# EAGLE board IOB-I2C-PCA9685-PWM_array (EAGLE 7.7.0)
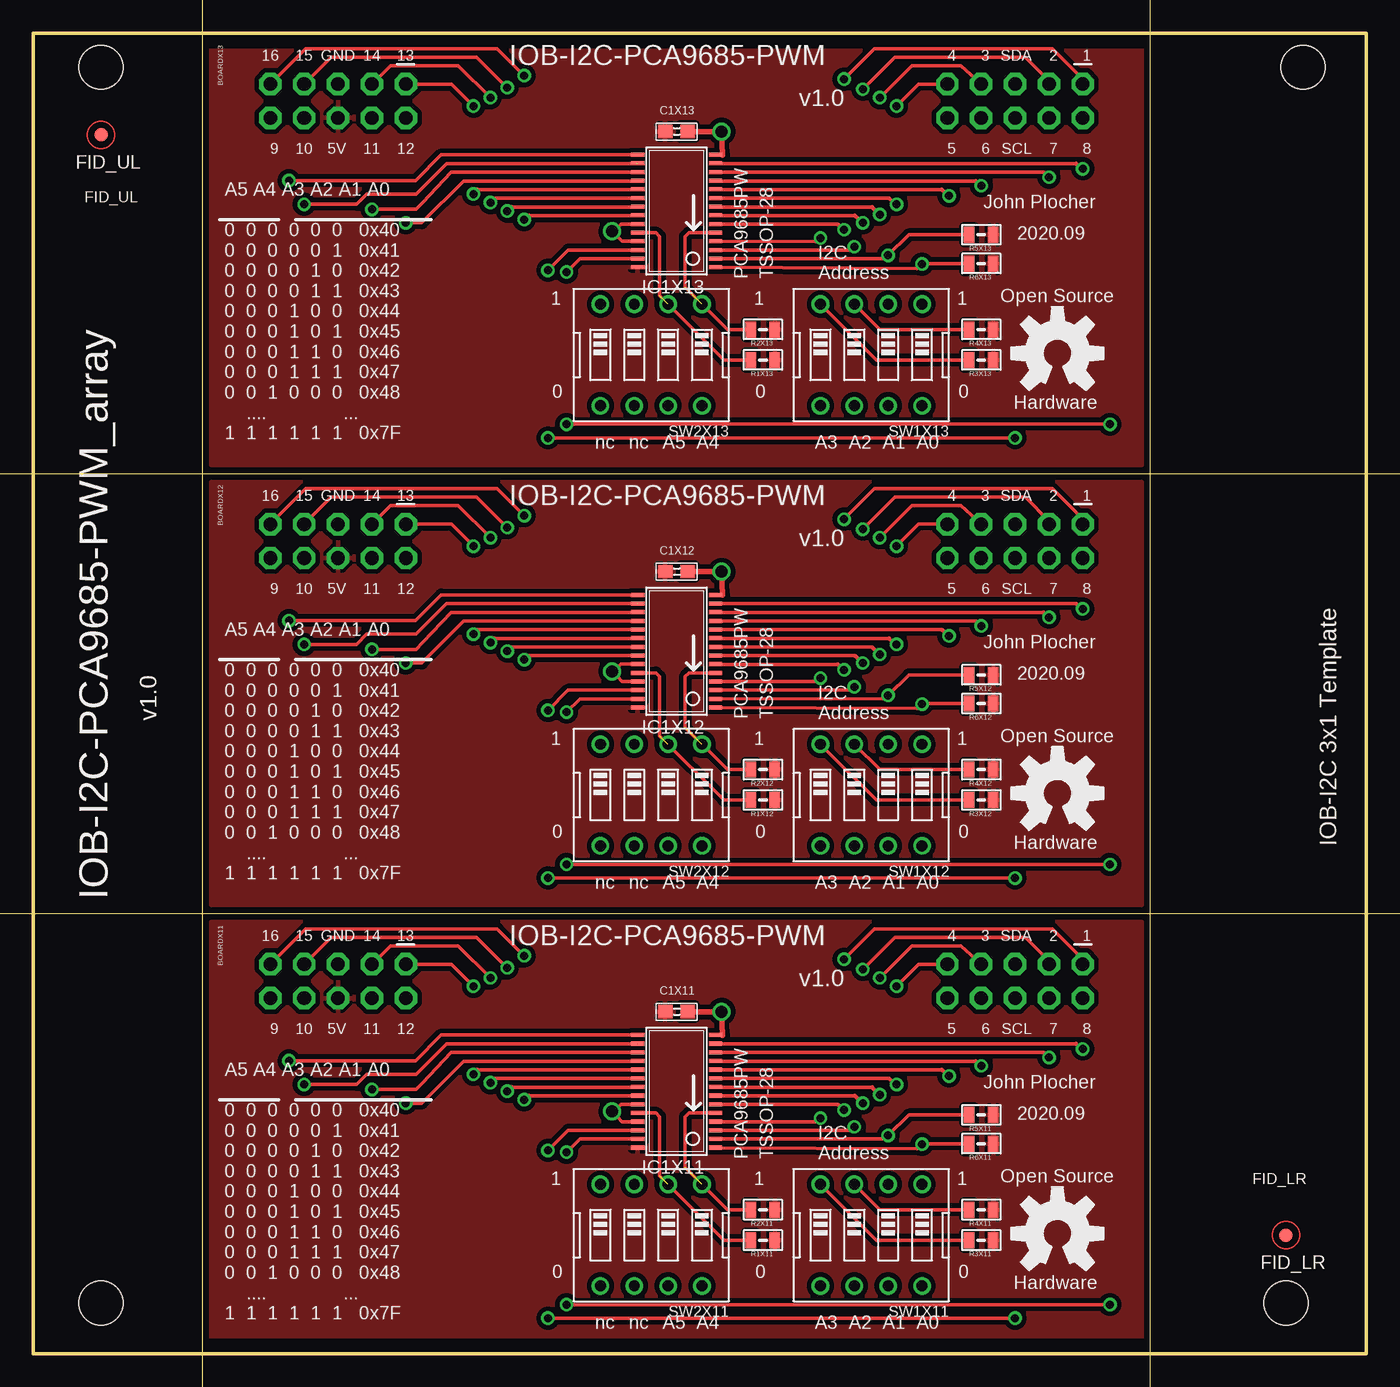
[diagram p0: board, top side]
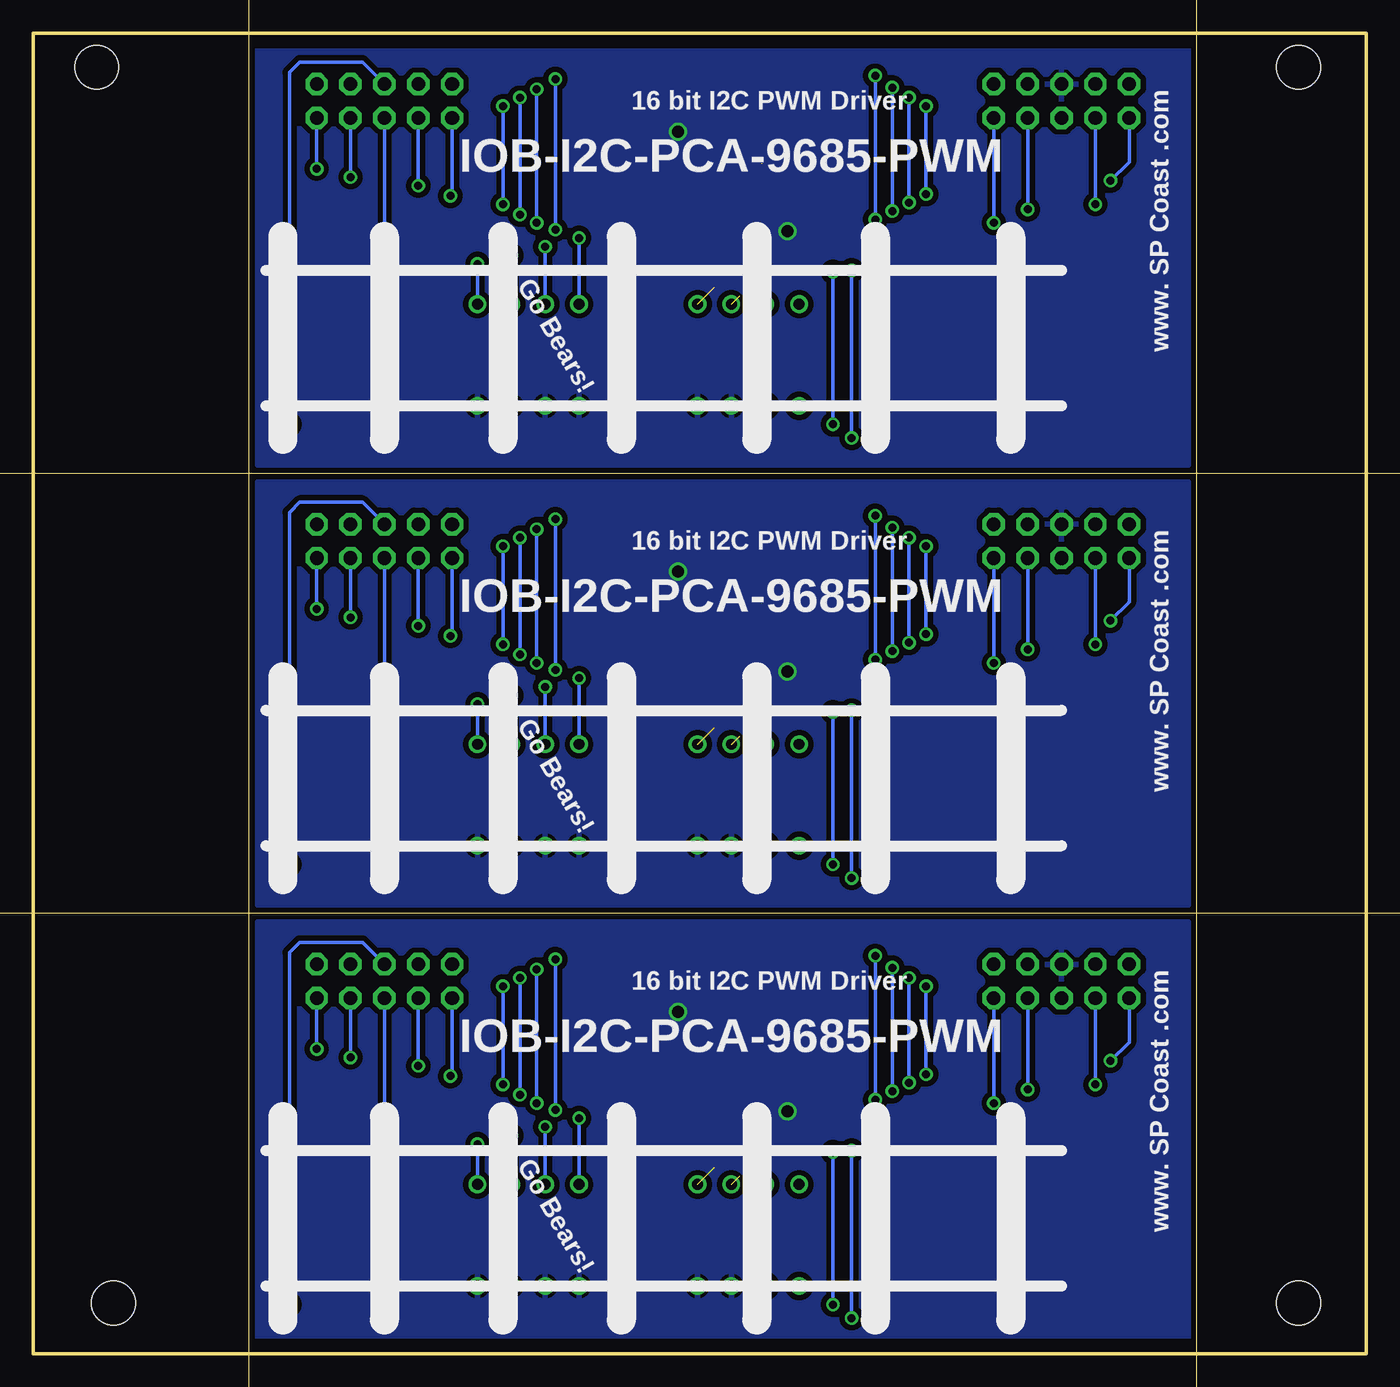
[diagram p1: board, bottom side, seen from below]

Size 100 x 99.06 mm. Coordinates in mm from the lower left corner, seen from the top.
Copper layers (1*16): Top 0.035mm / dielectric 1.5mm / Bottom 0.035mm
Design rules "default": minimum track width 10mil, minimum drill 0.6mm, track to track 8mil, track to pad 8mil, pad to pad 8mil, via to via 8mil, smd to smd 8mil, copper to edge 40mil, drill to drill 8mil, minimum pad ring 10mil, minimum via ring 8mil, stop-mask expansion 4mil, vias tented up to drill 0mil, thermal gap 10mil

## Footprints (pad centres in the part's own frame; a part is rotated, then mirrored left to right if it is on the bottom)
I2C-EXPANDER = drill 1.016 pad 1.676 octagon: 1 30.48,1.27; 2 27.94,1.27; 3 22.86,1.27; 4 20.32,1.27; 5 20.32,-1.27; 6 22.86,-1.27; 7 27.94,-1.27; 8 30.48,-1.27; 9 -30.48,-1.27; 10 -27.94,-1.27; 11 -22.86,-1.27; 12 -20.32,-1.27; 13 -20.32,1.27; 14 -22.86,1.27; 15 -27.94,1.27; 16 -30.48,1.27; GND -25.4,1.27; SCL 25.4,-1.27; SDA 25.4,1.27; VCC -25.4,-1.27
0603-CAP = smd 1.1 x 1: 1 -0.85,0; 2 0.85,0
FIDUCIAL_1MM = smd 1 x 1: 1 0,0
TSSOP28 = smd 0.305 x 0.991: 1 -4.225,-2.918; 2 -3.575,-2.918; 3 -2.925,-2.918; 4 -2.275,-2.918; 5 -1.625,-2.918; 6 -0.975,-2.918; 7 -0.325,-2.918; 8 0.325,-2.918; 9 0.975,-2.918; 10 1.625,-2.918; 11 2.275,-2.918; 12 2.925,-2.918; 13 3.575,-2.918; 14 4.225,-2.918; 15 4.225,2.918; 16 3.575,2.918; 17 2.925,2.918; 18 2.275,2.918; 19 1.625,2.918; 20 0.975,2.918; 21 0.325,2.918; 22 -0.325,2.918; 23 -0.975,2.918; 24 -1.625,2.918; 25 -2.275,2.918; 26 -2.925,2.918; 27 -3.575,2.918; 28 -4.225,2.918
0805-RES = smd 0.8 x 1.2: 1 -0.9,0; 2 0.9,0
EDG-04 = drill 0.813: 1 -3.81,-3.81; 2 -1.27,-3.81; 3 1.27,-3.81; 4 3.81,-3.81; 5 3.81,3.81; 6 1.27,3.81; 7 -1.27,3.81; 8 -3.81,3.81
BOARD-TEMPLATE-IOB-I2C-3X1-ARRAY = hole 3.3: 5.08,96.52; 95.25,96.52; 93.98,3.81; 5.08,3.81

## Placement (x,y rotation side)
BOARDX11  CONNECTOR-I2C-EXPANDER  [I2C-EXPANDER]  48.26,27.94 0 top
BOARDX12  CONNECTOR-I2C-EXPANDER  [I2C-EXPANDER]  48.26,60.96 0 top
BOARDX13  CONNECTOR-I2C-EXPANDER  [I2C-EXPANDER]  48.26,93.98 0 top
C1X11  0.1uF  [0603-CAP]  48.26,25.65 0 top
C1X12  0.1uF  [0603-CAP]  48.26,58.67 0 top
C1X13  0.1uF  [0603-CAP]  48.26,91.69 0 top
FID_LR  FIDUCIAL  [FIDUCIAL_1MM]  93.98,8.89 0 top
FID_UL  FIDUCIAL  [FIDUCIAL_1MM]  5.08,91.44 0 top
IC1X11  PCA9685PW  [TSSOP28]  48.26,19.68 90 top
IC1X12  PCA9685PW  [TSSOP28]  48.26,52.7 90 top
IC1X13  PCA9685PW  [TSSOP28]  48.26,85.72 90 top
R1X11  10k  [0805-RES]  54.74,8.51 180 top
R1X12  10k  [0805-RES]  54.74,41.53 180 top
R1X13  10k  [0805-RES]  54.74,74.55 180 top
R2X11  10k  [0805-RES]  54.74,10.79 180 top
R2X12  10k  [0805-RES]  54.74,43.81 180 top
R2X13  10k  [0805-RES]  54.74,76.83 180 top
R3X11  10k  [0805-RES]  71.12,8.51 180 top
R3X12  10k  [0805-RES]  71.12,41.53 180 top
R3X13  10k  [0805-RES]  71.12,74.55 180 top
R4X11  10k  [0805-RES]  71.12,10.79 180 top
R4X12  10k  [0805-RES]  71.12,43.81 180 top
R4X13  10k  [0805-RES]  71.12,76.83 180 top
R5X11  10k  [0805-RES]  71.12,17.91 180 top
R5X12  10k  [0805-RES]  71.12,50.93 180 top
R5X13  10k  [0805-RES]  71.12,83.95 180 top
R6X11  10k  [0805-RES]  71.12,15.75 180 top
R6X12  10k  [0805-RES]  71.12,48.77 180 top
R6X13  10k  [0805-RES]  71.12,81.79 180 top
SW1X11  SPSTx4  [EDG-04]  62.87,8.89 180 top
SW1X12  SPSTx4  [EDG-04]  62.87,41.91 180 top
SW1X13  SPSTx4  [EDG-04]  62.87,74.93 180 top
SW2X11  SPSTx4  [EDG-04]  46.35,8.89 180 top
SW2X12  SPSTx4  [EDG-04]  46.35,41.91 180 top
SW2X13  SPSTx4  [EDG-04]  46.35,74.93 180 top
U$1X11  OSHW  [OSHW-LOGO-L]  76.83,9.02 0 top
U$1X12  OSHW  [OSHW-LOGO-L]  76.83,42.04 0 top
U$1X13  OSHW  [OSHW-LOGO-L]  76.83,75.06 0 top
U$5X1  BOARD  [BOARD-TEMPLATE-IOB-I2C-3X1-ARRAY]  0,0 0 top

## Library data of the parts
BOARDX11-BOARDX13 C1X11-C1X13 FID_LR FID_UL IC1X11-IC1X13 R1X11-R1X13 R2X11-R2X13 R3X11-R3X13 R4X11-R4X13 R5X11-R5X13 R6X11-R6X13 SW1X11-SW1X13 SW2X11-SW2X13 U$1X11-U$1X13 U$5X1 = SPCoast

## Nets
A0X11: IC1X11.1 R6X11.2 SW1X11.1
A0X12: IC1X12.1 R6X12.2 SW1X12.1
A0X13: IC1X13.1 R6X13.2 SW1X13.1
A1X11: IC1X11.2 R5X11.2 SW1X11.2
A1X12: IC1X12.2 R5X12.2 SW1X12.2
A1X13: IC1X13.2 R5X13.2 SW1X13.2
A2X11: IC1X11.3 R4X11.2 SW1X11.3
A2X12: IC1X12.3 R4X12.2 SW1X12.3
A2X13: IC1X13.3 R4X13.2 SW1X13.3
A3X11: IC1X11.4 R3X11.2 SW1X11.4
A3X12: IC1X12.4 R3X12.2 SW1X12.4
A3X13: IC1X13.4 R3X13.2 SW1X13.4
A4X11: IC1X11.5 R2X11.2 SW2X11.1
A4X12: IC1X12.5 R2X12.2 SW2X12.1
A4X13: IC1X13.5 R2X13.2 SW2X13.1
A5X11: IC1X11.24 R1X11.2 SW2X11.2
A5X12: IC1X12.24 R1X12.2 SW2X12.2
A5X13: IC1X13.24 R1X13.2 SW2X13.2
GNDX11: BOARDX11.GND C1X11.2 IC1X11.14 IC1X11.23 IC1X11.25 SW1X11.5 SW1X11.6 SW1X11.7 SW1X11.8 SW2X11.7 SW2X11.8
GNDX12: BOARDX12.GND C1X12.2 IC1X12.14 IC1X12.23 IC1X12.25 SW1X12.5 SW1X12.6 SW1X12.7 SW1X12.8 SW2X12.7 SW2X12.8
GNDX13: BOARDX13.GND C1X13.2 IC1X13.14 IC1X13.23 IC1X13.25 SW1X13.5 SW1X13.6 SW1X13.7 SW1X13.8 SW2X13.7 SW2X13.8
P1X11: BOARDX11.1 IC1X11.6
P1X12: BOARDX12.1 IC1X12.6
P1X13: BOARDX13.1 IC1X13.6
P2X11: BOARDX11.2 IC1X11.7
P2X12: BOARDX12.2 IC1X12.7
P2X13: BOARDX13.2 IC1X13.7
P3X11: BOARDX11.3 IC1X11.8
P3X12: BOARDX12.3 IC1X12.8
P3X13: BOARDX13.3 IC1X13.8
P4X11: BOARDX11.4 IC1X11.9
P4X12: BOARDX12.4 IC1X12.9
P4X13: BOARDX13.4 IC1X13.9
P5X11: BOARDX11.5 IC1X11.10
P5X12: BOARDX12.5 IC1X12.10
P5X13: BOARDX13.5 IC1X13.10
P6X11: BOARDX11.6 IC1X11.11
P6X12: BOARDX12.6 IC1X12.11
P6X13: BOARDX13.6 IC1X13.11
P7X11: BOARDX11.7 IC1X11.12
P7X12: BOARDX12.7 IC1X12.12
P7X13: BOARDX13.7 IC1X13.12
P8X11: BOARDX11.8 IC1X11.13
P8X12: BOARDX12.8 IC1X12.13
P8X13: BOARDX13.8 IC1X13.13
P9X11: BOARDX11.9 IC1X11.15
P9X12: BOARDX12.9 IC1X12.15
P9X13: BOARDX13.9 IC1X13.15
P10X11: BOARDX11.10 IC1X11.16
P10X12: BOARDX12.10 IC1X12.16
P10X13: BOARDX13.10 IC1X13.16
P11X11: BOARDX11.11 IC1X11.17
P11X12: BOARDX12.11 IC1X12.17
P11X13: BOARDX13.11 IC1X13.17
P12X11: BOARDX11.12 IC1X11.18
P12X12: BOARDX12.12 IC1X12.18
P12X13: BOARDX13.12 IC1X13.18
P13X11: BOARDX11.13 IC1X11.19
P13X12: BOARDX12.13 IC1X12.19
P13X13: BOARDX13.13 IC1X13.19
P14X11: BOARDX11.14 IC1X11.20
P14X12: BOARDX12.14 IC1X12.20
P14X13: BOARDX13.14 IC1X13.20
P15X11: BOARDX11.15 IC1X11.21
P15X12: BOARDX12.15 IC1X12.21
P15X13: BOARDX13.15 IC1X13.21
P16X11: BOARDX11.16 IC1X11.22
P16X12: BOARDX12.16 IC1X12.22
P16X13: BOARDX13.16 IC1X13.22
SCLX11: BOARDX11.SCL IC1X11.26
SCLX12: BOARDX12.SCL IC1X12.26
SCLX13: BOARDX13.SCL IC1X13.26
SDAX11: BOARDX11.SDA IC1X11.27
SDAX12: BOARDX12.SDA IC1X12.27
SDAX13: BOARDX13.SDA IC1X13.27
VCCX11: BOARDX11.VCC C1X11.1 IC1X11.28 R1X11.1 R2X11.1 R3X11.1 R4X11.1 R5X11.1 R6X11.1
VCCX12: BOARDX12.VCC C1X12.1 IC1X12.28 R1X12.1 R2X12.1 R3X12.1 R4X12.1 R5X12.1 R6X12.1
VCCX13: BOARDX13.VCC C1X13.1 IC1X13.28 R1X13.1 R2X13.1 R3X13.1 R4X13.1 R5X13.1 R6X13.1

## Tracks (layer width: path | path; a pad name or v marks a point on that pad's centre or on a via)
A0X11  (via drill 0.6 pad 0.9)
  Top 0.254: IC1X11.1 66.29,15.37 66.64,15.71 v66.67,15.71 66.71,15.75 R6X11.2
  Bottom 0.254: v66.67,15.71 SW1X11.1
A0X12  (via drill 0.6 pad 0.9)
  Top 0.254: IC1X12.1 66.29,48.39 66.64,48.73 v66.67,48.73 66.71,48.77 R6X12.2
  Bottom 0.254: v66.67,48.73 SW1X12.1
A0X13  (via drill 0.6 pad 0.9)
  Top 0.254: IC1X13.1 66.29,81.41 66.64,81.75 v66.67,81.75 66.71,81.79 R6X13.2
  Bottom 0.254: v66.67,81.75 SW1X13.1
A1X11  (via drill 0.6 pad 0.9)
  Top 0.254: IC1X11.2 63.75,16.13 63.99,16.36 v64.14,16.36 65.68,17.91 R5X11.2
  Bottom 0.254: v64.14,16.36 SW1X11.2
A1X12  (via drill 0.6 pad 0.9)
  Top 0.254: IC1X12.2 63.75,49.15 63.99,49.38 v64.14,49.38 65.68,50.93 R5X12.2
  Bottom 0.254: v64.14,49.38 SW1X12.2
A1X13  (via drill 0.6 pad 0.9)
  Top 0.254: IC1X13.2 63.75,82.17 63.99,82.4 v64.14,82.4 65.68,83.95 R5X13.2
  Bottom 0.254: v64.14,82.4 SW1X13.2
A2X11  (via drill 0.6 pad 0.9)
  Top 0.254: IC1X11.3 61.21,16.76 61.46,17.01 v61.59,17.01 | R4X11.2 63.5,10.79 SW1X11.3
  Bottom 0.254: v61.59,17.01 SW1X11.3
A2X12  (via drill 0.6 pad 0.9)
  Top 0.254: IC1X12.3 61.21,49.78 61.46,50.03 v61.59,50.03 | R4X12.2 63.5,43.81 SW1X12.3
  Bottom 0.254: v61.59,50.03 SW1X12.3
A2X13  (via drill 0.6 pad 0.9)
  Top 0.254: IC1X13.3 61.21,82.8 61.46,83.05 v61.59,83.05 | R4X13.2 63.5,76.83 SW1X13.3
  Bottom 0.254: v61.59,83.05 SW1X13.3
A3X11  (via drill 0.6 pad 0.9)
  Top 0.254: IC1X11.4 58.67,17.4 58.94,17.66 v59.05,17.66 | R3X11.2 63.25,8.51 SW1X11.4
  Bottom 0.254: v59.05,17.66 SW1X11.4
A3X12  (via drill 0.6 pad 0.9)
  Top 0.254: IC1X12.4 58.67,50.42 58.94,50.68 v59.05,50.68 | R3X12.2 63.25,41.53 SW1X12.4
  Bottom 0.254: v59.05,50.68 SW1X12.4
A3X13  (via drill 0.6 pad 0.9)
  Top 0.254: IC1X13.4 58.67,83.44 58.94,83.7 v59.05,83.7 | R3X13.2 63.25,74.55 SW1X13.4
  Bottom 0.254: v59.05,83.7 SW1X13.4
A4X11  (1 unrouted)
  Top 0.254: IC1X11.5 49.17,18.06 48.9,17.78 48.9,13.97 52.07,10.79 R2X11.2
A4X12  (1 unrouted)
  Top 0.254: IC1X12.5 49.17,51.08 48.9,50.8 48.9,46.99 52.07,43.81 R2X12.2
A4X13  (1 unrouted)
  Top 0.254: IC1X13.5 49.17,84.1 48.9,83.82 48.9,80.01 52.07,76.83 R2X13.2
A5X11  (1 unrouted)
  Top 0.254: IC1X11.24 46.71,18.06 46.99,17.78 46.99,13.34 51.82,8.51 R1X11.2
A5X12  (1 unrouted)
  Top 0.254: IC1X12.24 46.71,51.08 46.99,50.8 46.99,46.35 51.82,41.53 R1X12.2
A5X13  (1 unrouted)
  Top 0.254: IC1X13.24 46.71,84.1 46.99,83.82 46.99,79.38 51.82,74.55 R1X13.2
GNDX11  (via drill 0.9 pad 1.35)
  Top 0.254: IC1X11.25 44.19,17.41 43.81,17.78 | 43.81,17.78 43.81,18.41 44.11,18.71 IC1X11.23 | v43.43,18.16 43.81,17.78 | IC1X11.14 51.69,23.91 51.71,23.89
  Top 0.406: 51.71,23.89 v51.64,25.65 C1X11.2
  pour Bottom (isolate 0.406, rank 2): 83.19,0.64 83.19,32.38 13.34,32.38 13.34,0.64
GNDX12  (via drill 0.9 pad 1.35)
  Top 0.254: IC1X12.25 44.19,50.43 43.81,50.8 | 43.81,50.8 43.81,51.44 44.11,51.73 IC1X12.23 | v43.43,51.18 43.81,50.8 | IC1X12.14 51.69,56.93 51.71,56.91
  Top 0.406: 51.71,56.91 v51.64,58.67 C1X12.2
  pour Bottom (isolate 0.406, rank 2): 83.19,33.66 83.19,65.41 13.34,65.41 13.34,33.66
GNDX13  (via drill 0.9 pad 1.35)
  Top 0.254: IC1X13.25 44.19,83.45 43.81,83.82 | 43.81,83.82 43.81,84.45 44.11,84.75 IC1X13.23 | v43.43,84.2 43.81,83.82 | IC1X13.14 51.69,89.95 51.71,89.94
  Top 0.406: 51.71,89.94 v51.64,91.69 C1X13.2
  pour Bottom (isolate 0.406, rank 2): 83.19,66.67 83.19,98.42 13.34,98.42 13.34,66.67
P1X11  (via drill 0.6 pad 0.9)
  Top 0.254: v60.83,29.59 63.12,31.88 76.45,31.88 78.74,29.59 BOARDX11.1 | 60.35,18.7 51.19,18.7 IC1X11.6
  Top 0.305: 60.35,18.7 v60.83,18.29
  Bottom 0.254: v60.83,18.29 v60.83,29.59
P1X12  (via drill 0.6 pad 0.9)
  Top 0.254: v60.83,62.61 63.12,64.9 76.45,64.9 78.74,62.61 BOARDX12.1 | 60.35,51.72 51.19,51.72 IC1X12.6
  Top 0.305: 60.35,51.72 v60.83,51.31
  Bottom 0.254: v60.83,51.31 v60.83,62.61
P1X13  (via drill 0.6 pad 0.9)
  Top 0.254: v60.83,95.63 63.12,97.92 76.45,97.92 78.74,95.63 BOARDX13.1 | 60.35,84.73 51.19,84.73 IC1X13.6
  Top 0.305: 60.35,84.73 v60.83,84.33
  Bottom 0.254: v60.83,84.33 v60.83,95.63
P2X11  (via drill 0.6 pad 0.9)
  Top 0.254: v62.23,28.83 64.64,31.24 74.42,31.24 76.2,29.46 BOARDX11.2 | 61.64,19.34 51.19,19.34 IC1X11.7
  Top 0.305: 61.64,19.34 v62.23,18.8
  Bottom 0.254: v62.23,18.8 v62.23,28.83
P2X12  (via drill 0.6 pad 0.9)
  Top 0.254: v62.23,61.85 64.64,64.26 74.42,64.26 76.2,62.48 BOARDX12.2 | 61.64,52.37 51.19,52.37 IC1X12.7
  Top 0.305: 61.64,52.37 v62.23,51.82
  Bottom 0.254: v62.23,51.82 v62.23,61.85
P2X13  (via drill 0.6 pad 0.9)
  Top 0.254: v62.23,94.87 64.64,97.28 74.42,97.28 76.2,95.5 BOARDX13.2 | 61.64,85.39 51.19,85.39 IC1X13.7
  Top 0.305: 61.64,85.39 v62.23,84.84
  Bottom 0.254: v62.23,84.84 v62.23,94.87
P3X11  (via drill 0.6 pad 0.9)
  Top 0.254: v63.5,28.19 65.91,30.61 69.6,30.61 BOARDX11.3 | 62.92,20 51.19,20 IC1X11.8
  Top 0.305: 62.92,20 v63.5,19.43
  Bottom 0.254: v63.5,19.43 v63.5,28.19
P3X12  (via drill 0.6 pad 0.9)
  Top 0.254: v63.5,61.21 65.91,63.63 69.6,63.63 BOARDX12.3 | 62.92,53.02 51.19,53.02 IC1X12.8
  Top 0.305: 62.92,53.02 v63.5,52.45
  Bottom 0.254: v63.5,52.45 v63.5,61.21
P3X13  (via drill 0.6 pad 0.9)
  Top 0.254: v63.5,94.23 65.91,96.65 69.6,96.65 BOARDX13.3 | 62.92,86.03 51.19,86.03 IC1X13.8
  Top 0.305: 62.92,86.03 v63.5,85.47
  Bottom 0.254: v63.5,85.47 v63.5,94.23
P4X11  (via drill 0.6 pad 0.9)
  Top 0.254: BOARDX11.4 66.42,29.21 v64.77,27.56 | 64.21,20.64 51.19,20.64 IC1X11.9
  Top 0.305: 64.21,20.64 v64.77,20.19
  Bottom 0.254: v64.77,27.56 v64.77,20.19
P4X12  (via drill 0.6 pad 0.9)
  Top 0.254: BOARDX12.4 66.42,62.23 v64.77,60.58 | 64.21,53.66 51.19,53.66 IC1X12.9
  Top 0.305: 64.21,53.66 v64.77,53.21
  Bottom 0.254: v64.77,60.58 v64.77,53.21
P4X13  (via drill 0.6 pad 0.9)
  Top 0.254: BOARDX13.4 66.42,95.25 v64.77,93.6 | 64.21,86.69 51.19,86.69 IC1X13.9
  Top 0.305: 64.21,86.69 v64.77,86.23
  Bottom 0.254: v64.77,93.6 v64.77,86.23
P5X11  (via drill 0.6 pad 0.9)
  Top 0.254: 68.16,21.3 51.19,21.3 IC1X11.10
  Top 0.305: 68.16,21.3 v68.71,20.83
  Bottom 0.254: BOARDX11.5 68.58,20.83 v68.71,20.83
P5X12  (via drill 0.6 pad 0.9)
  Top 0.254: 68.16,54.31 51.19,54.31 IC1X12.10
  Top 0.305: 68.16,54.31 v68.71,53.85
  Bottom 0.254: BOARDX12.5 68.58,53.85 v68.71,53.85
P5X13  (via drill 0.6 pad 0.9)
  Top 0.254: 68.16,87.33 51.19,87.33 IC1X13.10
  Top 0.305: 68.16,87.33 v68.71,86.87
  Bottom 0.254: BOARDX13.5 68.58,86.87 v68.71,86.87
P6X11  (via drill 0.6 pad 0.9)
  Top 0.254: 70.71,21.95 51.19,21.95 IC1X11.11
  Top 0.305: 70.71,21.95 v71.12,21.59
  Bottom 0.254: BOARDX11.6 v71.12,21.59
P6X12  (via drill 0.6 pad 0.9)
  Top 0.254: 70.71,54.97 51.19,54.97 IC1X12.11
  Top 0.305: 70.71,54.97 v71.12,54.61
  Bottom 0.254: BOARDX12.6 v71.12,54.61
P6X13  (via drill 0.6 pad 0.9)
  Top 0.254: 70.71,87.98 51.19,87.98 IC1X13.11
  Top 0.305: 70.71,87.98 v71.12,87.63
  Bottom 0.254: BOARDX13.6 v71.12,87.63
P7X11  (via drill 0.6 pad 0.9)
  Top 0.254: 75.81,22.59 51.19,22.59 IC1X11.12
  Top 0.305: 75.81,22.59 v76.2,22.23
  Bottom 0.254: BOARDX11.7 v76.2,22.23
P7X12  (via drill 0.6 pad 0.9)
  Top 0.254: 75.81,55.62 51.19,55.62 IC1X12.12
  Top 0.305: 75.81,55.62 v76.2,55.24
  Bottom 0.254: BOARDX12.7 v76.2,55.24
P7X13  (via drill 0.6 pad 0.9)
  Top 0.254: 75.81,88.64 51.19,88.64 IC1X13.12
  Top 0.305: 75.81,88.64 v76.2,88.27
  Bottom 0.254: BOARDX13.7 v76.2,88.27
P8X11  (via drill 0.6 pad 0.9)
  Top 0.254: 78.24,23.25 51.19,23.25 IC1X11.13
  Top 0.305: 78.24,23.25 v78.74,22.86
  Bottom 0.254: BOARDX11.8 v78.74,22.86
P8X12  (via drill 0.6 pad 0.9)
  Top 0.254: 78.24,56.27 51.19,56.27 IC1X12.13
  Top 0.305: 78.24,56.27 v78.74,55.88
  Bottom 0.254: BOARDX12.8 v78.74,55.88
P8X13  (via drill 0.6 pad 0.9)
  Top 0.254: 78.24,89.28 51.19,89.28 IC1X13.13
  Top 0.305: 78.24,89.28 v78.74,88.9
  Bottom 0.254: BOARDX13.8 v78.74,88.9
P9X11  (via drill 0.6 pad 0.9)
  Top 0.254: IC1X11.15 30.6,23.91 28.66,21.97 v19.18,21.97
  Bottom 0.254: BOARDX11.9 17.78,23.37 v19.18,21.97
P9X12  (via drill 0.6 pad 0.9)
  Top 0.254: IC1X12.15 30.6,56.93 28.66,54.99 v19.18,54.99
  Bottom 0.254: BOARDX12.9 17.78,56.39 v19.18,54.99
P9X13  (via drill 0.6 pad 0.9)
  Top 0.254: IC1X13.15 30.6,89.95 28.66,88.01 v19.18,88.01
  Bottom 0.254: BOARDX13.9 17.78,89.41 v19.18,88.01
P10X11  (via drill 0.6 pad 0.9)  (1 unrouted)
  Top 0.254: 45.34,23.24 30.99,23.24 28.7,20.95 25.02,20.95 24.26,20.19 v20.32,20.19
  Bottom 0.254: BOARDX11.10 v20.32,20.19
P10X12  (via drill 0.6 pad 0.9)  (1 unrouted)
  Top 0.254: 45.34,56.26 30.99,56.26 28.7,53.98 25.02,53.98 24.26,53.21 v20.32,53.21
  Bottom 0.254: BOARDX12.10 v20.32,53.21
P10X13  (via drill 0.6 pad 0.9)  (1 unrouted)
  Top 0.254: 45.34,89.28 30.99,89.28 28.7,87 25.02,87 24.26,86.23 v20.32,86.23
  Bottom 0.254: BOARDX13.10 v20.32,86.23
P11X11  (via drill 0.6 pad 0.9)
  Top 0.254: IC1X11.17 45.33,22.59 31.36,22.59 29.21,20.32 28.7,19.81 v25.4,19.81
  Bottom 0.254: BOARDX11.11 v25.4,19.81
P11X12  (via drill 0.6 pad 0.9)
  Top 0.254: IC1X12.17 45.33,55.62 31.36,55.62 29.21,53.34 28.7,52.83 v25.4,52.83
  Bottom 0.254: BOARDX12.11 v25.4,52.83
P11X13  (via drill 0.6 pad 0.9)
  Top 0.254: IC1X13.17 45.33,88.64 31.36,88.64 29.21,86.36 28.7,85.85 v25.4,85.85
  Bottom 0.254: BOARDX13.11 v25.4,85.85
P12X11  (via drill 0.6 pad 0.9)
  Top 0.254: IC1X11.18 45.33,21.95 32.28,21.95 29.14,18.8 v27.94,18.8
  Bottom 0.254: BOARDX11.12 v27.94,18.8
P12X12  (via drill 0.6 pad 0.9)
  Top 0.254: IC1X12.18 45.33,54.97 32.28,54.97 29.14,51.82 v27.94,51.82
  Bottom 0.254: BOARDX12.12 v27.94,51.82
P12X13  (via drill 0.6 pad 0.9)
  Top 0.254: IC1X13.18 45.33,87.98 32.28,87.98 29.14,84.84 v27.94,84.84
  Bottom 0.254: BOARDX13.12 v27.94,84.84
P13X11  (via drill 0.6 pad 0.9)
  Top 0.254: BOARDX11.13 31.37,29.21 v33.02,27.56 | 33.31,21.3 45.33,21.3 IC1X11.19
  Top 0.305: 33.31,21.3 v33.02,20.95
  Bottom 0.254: v33.02,27.56 v33.02,20.95
P13X12  (via drill 0.6 pad 0.9)
  Top 0.254: BOARDX12.13 31.37,62.23 v33.02,60.58 | 33.31,54.31 45.33,54.31 IC1X12.19
  Top 0.305: 33.31,54.31 v33.02,53.98
  Bottom 0.254: v33.02,60.58 v33.02,53.98
P13X13  (via drill 0.6 pad 0.9)
  Top 0.254: BOARDX13.13 31.37,95.25 v33.02,93.6 | 33.31,87.33 45.33,87.33 IC1X13.19
  Top 0.305: 33.31,87.33 v33.02,87
  Bottom 0.254: v33.02,93.6 v33.02,87
P14X11  (via drill 0.6 pad 0.9)
  Top 0.254: BOARDX11.14 26.8,30.61 31.88,30.61 v34.29,28.19 | 34.6,20.64 45.33,20.64 IC1X11.20
  Top 0.305: 34.6,20.64 v34.29,20.32
  Bottom 0.254: v34.29,28.19 v34.29,20.32
P14X12  (via drill 0.6 pad 0.9)
  Top 0.254: BOARDX12.14 26.8,63.63 31.88,63.63 v34.29,61.21 | 34.6,53.66 45.33,53.66 IC1X12.20
  Top 0.305: 34.6,53.66 v34.29,53.34
  Bottom 0.254: v34.29,61.21 v34.29,53.34
P14X13  (via drill 0.6 pad 0.9)
  Top 0.254: BOARDX13.14 26.8,96.65 31.88,96.65 v34.29,94.23 | 34.6,86.69 45.33,86.69 IC1X13.20
  Top 0.305: 34.6,86.69 v34.29,86.36
  Bottom 0.254: v34.29,94.23 v34.29,86.36
P15X11  (via drill 0.6 pad 0.9)
  Top 0.254: BOARDX11.15 22.35,31.24 33.27,31.24 v35.56,28.96 | 35.88,20 45.33,20 IC1X11.21
  Top 0.305: 35.88,20 v35.56,19.68
  Bottom 0.254: v35.56,28.96 v35.56,19.68
P15X12  (via drill 0.6 pad 0.9)
  Top 0.254: BOARDX12.15 22.35,64.26 33.27,64.26 v35.56,61.98 | 35.88,53.02 45.33,53.02 IC1X12.21
  Top 0.305: 35.88,53.02 v35.56,52.7
  Bottom 0.254: v35.56,61.98 v35.56,52.7
P15X13  (via drill 0.6 pad 0.9)
  Top 0.254: BOARDX13.15 22.35,97.28 33.27,97.28 v35.56,95 | 35.88,86.03 45.33,86.03 IC1X13.21
  Top 0.305: 35.88,86.03 v35.56,85.72
  Bottom 0.254: v35.56,95 v35.56,85.72
P16X11  (via drill 0.6 pad 0.9)
  Top 0.254: BOARDX11.16 20.45,31.88 34.8,31.88 v36.83,29.84 | 37.17,19.34 45.33,19.34 IC1X11.22
  Top 0.305: 37.17,19.34 v36.83,19.05
  Bottom 0.254: v36.83,29.84 v36.83,19.05
P16X12  (via drill 0.6 pad 0.9)
  Top 0.254: BOARDX12.16 20.45,64.9 34.8,64.9 v36.83,62.87 | 37.17,52.37 45.33,52.37 IC1X12.22
  Top 0.305: 37.17,52.37 v36.83,52.07
  Bottom 0.254: v36.83,62.87 v36.83,52.07
P16X13  (via drill 0.6 pad 0.9)
  Top 0.254: BOARDX13.16 20.45,97.92 34.8,97.92 v36.83,95.89 | 37.17,85.39 45.33,85.39 IC1X13.22
  Top 0.305: 37.17,85.39 v36.83,85.09
  Bottom 0.254: v36.83,95.89 v36.83,85.09
SCLX11  (via drill 0.6 pad 0.9)
  Top 0.254: IC1X11.26 40.13,16.76 v38.61,15.24 | v73.66,2.67 v38.61,2.67
  Bottom 0.254: v38.61,15.24 v38.61,2.67 | BOARDX11.SCL v73.66,2.67
SCLX12  (via drill 0.6 pad 0.9)
  Top 0.254: IC1X12.26 40.13,49.78 v38.61,48.26 | v73.66,35.69 v38.61,35.69
  Bottom 0.254: v38.61,48.26 v38.61,35.69 | BOARDX12.SCL v73.66,35.69
SCLX13  (via drill 0.6 pad 0.9)
  Top 0.254: IC1X13.26 40.13,82.8 v38.61,81.28 | v73.66,68.71 v38.61,68.71
  Bottom 0.254: v38.61,81.28 v38.61,68.71 | BOARDX13.SCL v73.66,68.71
SDAX11  (via drill 0.6 pad 0.9)
  Top 0.254: IC1X11.27 41,16.11 v40.01,15.11 | v80.77,3.68 v40.01,3.68
  Bottom 0.254: v40.01,15.11 v40.01,3.68 | BOARDX11.SDA 75.31,30.86 80.01,30.86 80.77,30.1 v80.77,3.68
SDAX12  (via drill 0.6 pad 0.9)
  Top 0.254: IC1X12.27 41,49.13 v40.01,48.13 | v80.77,36.7 v40.01,36.7
  Bottom 0.254: v40.01,48.13 v40.01,36.7 | BOARDX12.SDA 75.31,63.88 80.01,63.88 80.77,63.12 v80.77,36.7
SDAX13  (via drill 0.6 pad 0.9)
  Top 0.254: IC1X13.27 41,82.15 v40.01,81.15 | v80.77,69.72 v40.01,69.72
  Bottom 0.254: v40.01,81.15 v40.01,69.72 | BOARDX13.SDA 75.31,96.9 80.01,96.9 80.77,96.14 v80.77,69.72
VCCX11
  pour Top (isolate 0.356, rank 2): 83.19,0.64 83.19,32.38 13.34,32.38 13.34,0.64
VCCX12
  pour Top (isolate 0.356, rank 2): 83.19,33.66 83.19,65.41 13.34,65.41 13.34,33.66
VCCX13
  pour Top (isolate 0.356, rank 2): 83.19,66.67 83.19,98.42 13.34,98.42 13.34,66.67

## Text on the board
tPlace: IOB-I2C-PCA9685-PWM | v1.0 | John Plocher | 2020.09 | PCA9685PW | TSSOP-28 | I2C / Address | 1 | 1 | 1 | Open Source | 0 | 0 | 0 | Hardware | A5 A4 A3 A2 A1 A0 / / 0 0 0 0 0 0 0x40 / 0 0 0 0 0 1 0x41 / 0 0 0 0 1 0 0x42 / 0 0 0 0 1 1 0x43 / 0 0 0 1 0 0 0x44 / 0 0 0 1 0 1 0x45 / 0 0 0 1 1 0 0x46 / 0 0 0 1 1 1 0x47 / 0 0 1 0 0 0 0x48 / .... ... / 1 1 1 1 1 1 0x7F | nc | nc | A5 | A4 | A3 | A2 | A1 | A0 | IOB-I2C-PCA9685-PWM | v1.0 | John Plocher | 2020.09 | PCA9685PW | TSSOP-28 | I2C / Address | v1.0 | 1 | 1 | 1 | Open Source | 0 | 0 | 0 | Hardware | A5 A4 A3 A2 A1 A0 / / 0 0 0 0 0 0 0x40 / 0 0 0 0 0 1 0x41 / 0 0 0 0 1 0 0x42 / 0 0 0 0 1 1 0x43 / 0 0 0 1 0 0 0x44 / 0 0 0 1 0 1 0x45 / 0 0 0 1 1 0 0x46 / 0 0 0 1 1 1 0x47 / 0 0 1 0 0 0 0x48 / .... ... / 1 1 1 1 1 1 0x7F | nc | nc | A5 | A4 | A3 | A2 | A1 | A0 | IOB-I2C-PCA9685-PWM | v1.0 | John Plocher | 2020.09 | PCA9685PW | TSSOP-28 | I2C / Address | 1 | 1 | 1 | Open Source | 0 | 0 | 0 | Hardware | A5 A4 A3 A2 A1 A0 / / 0 0 0 0 0 0 0x40 / 0 0 0 0 0 1 0x41 / 0 0 0 0 1 0 0x42 / 0 0 0 0 1 1 0x43 / 0 0 0 1 0 0 0x44 / 0 0 0 1 0 1 0x45 / 0 0 0 1 1 0 0x46 / 0 0 0 1 1 1 0x47 / 0 0 1 0 0 0 0x48 / .... ... / 1 1 1 1 1 1 0x7F | nc | nc | A5 | A4 | A3 | A2 | A1 | A0
bPlace: www. SP Coast .com | 16 bit I2C PWM Driver | IOB-I2C-PCA-9685-PWM | Go Bears! | www. SP Coast .com | 16 bit I2C PWM Driver | IOB-I2C-PCA-9685-PWM | Go Bears! | www. SP Coast .com | 16 bit I2C PWM Driver | IOB-I2C-PCA-9685-PWM | Go Bears!
_tNames: BOARD | C1 | IC1 | R5 | R6 | R2 | R4 | R1 | R3 | SW2 | SW1 | BOARD | C1 | IC1 | R5 | R6 | R2 | R4 | R1 | R3 | SW2 | SW1 | BOARD | C1 | IC1 | R5 | R6 | R2 | R4 | R1 | R3 | SW2 | SW1